# Altium PCB (2023-EE-012)Exp-6.PcbDoc
Units mm, origin at the board's own origin, x right, y up, seen from the top; angles counter-clockwise.
Board outline 166.88 x 122.56 mm, 2 copper layers (Top Layer, Bottom Layer); 85 components, 129 nets, 297 pads, 81 vias.
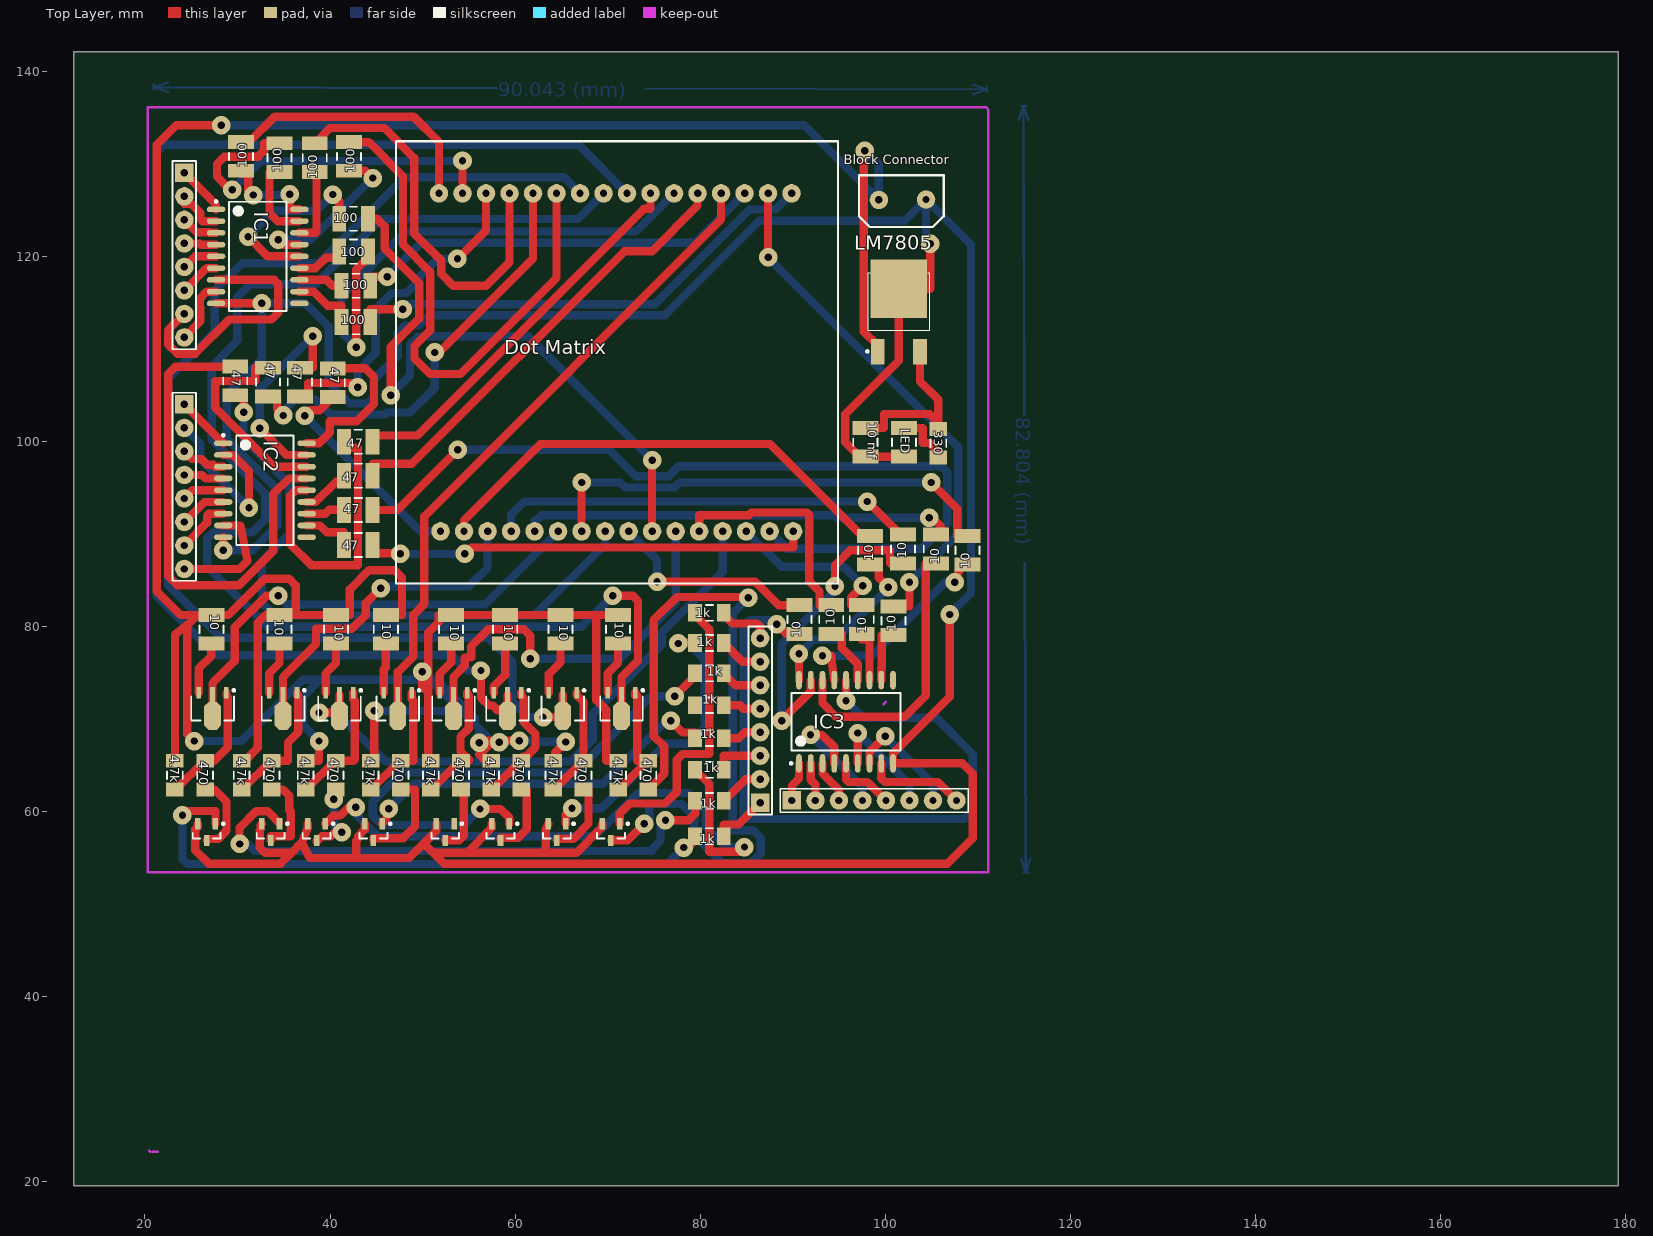
[diagram p0: Top Layer view]
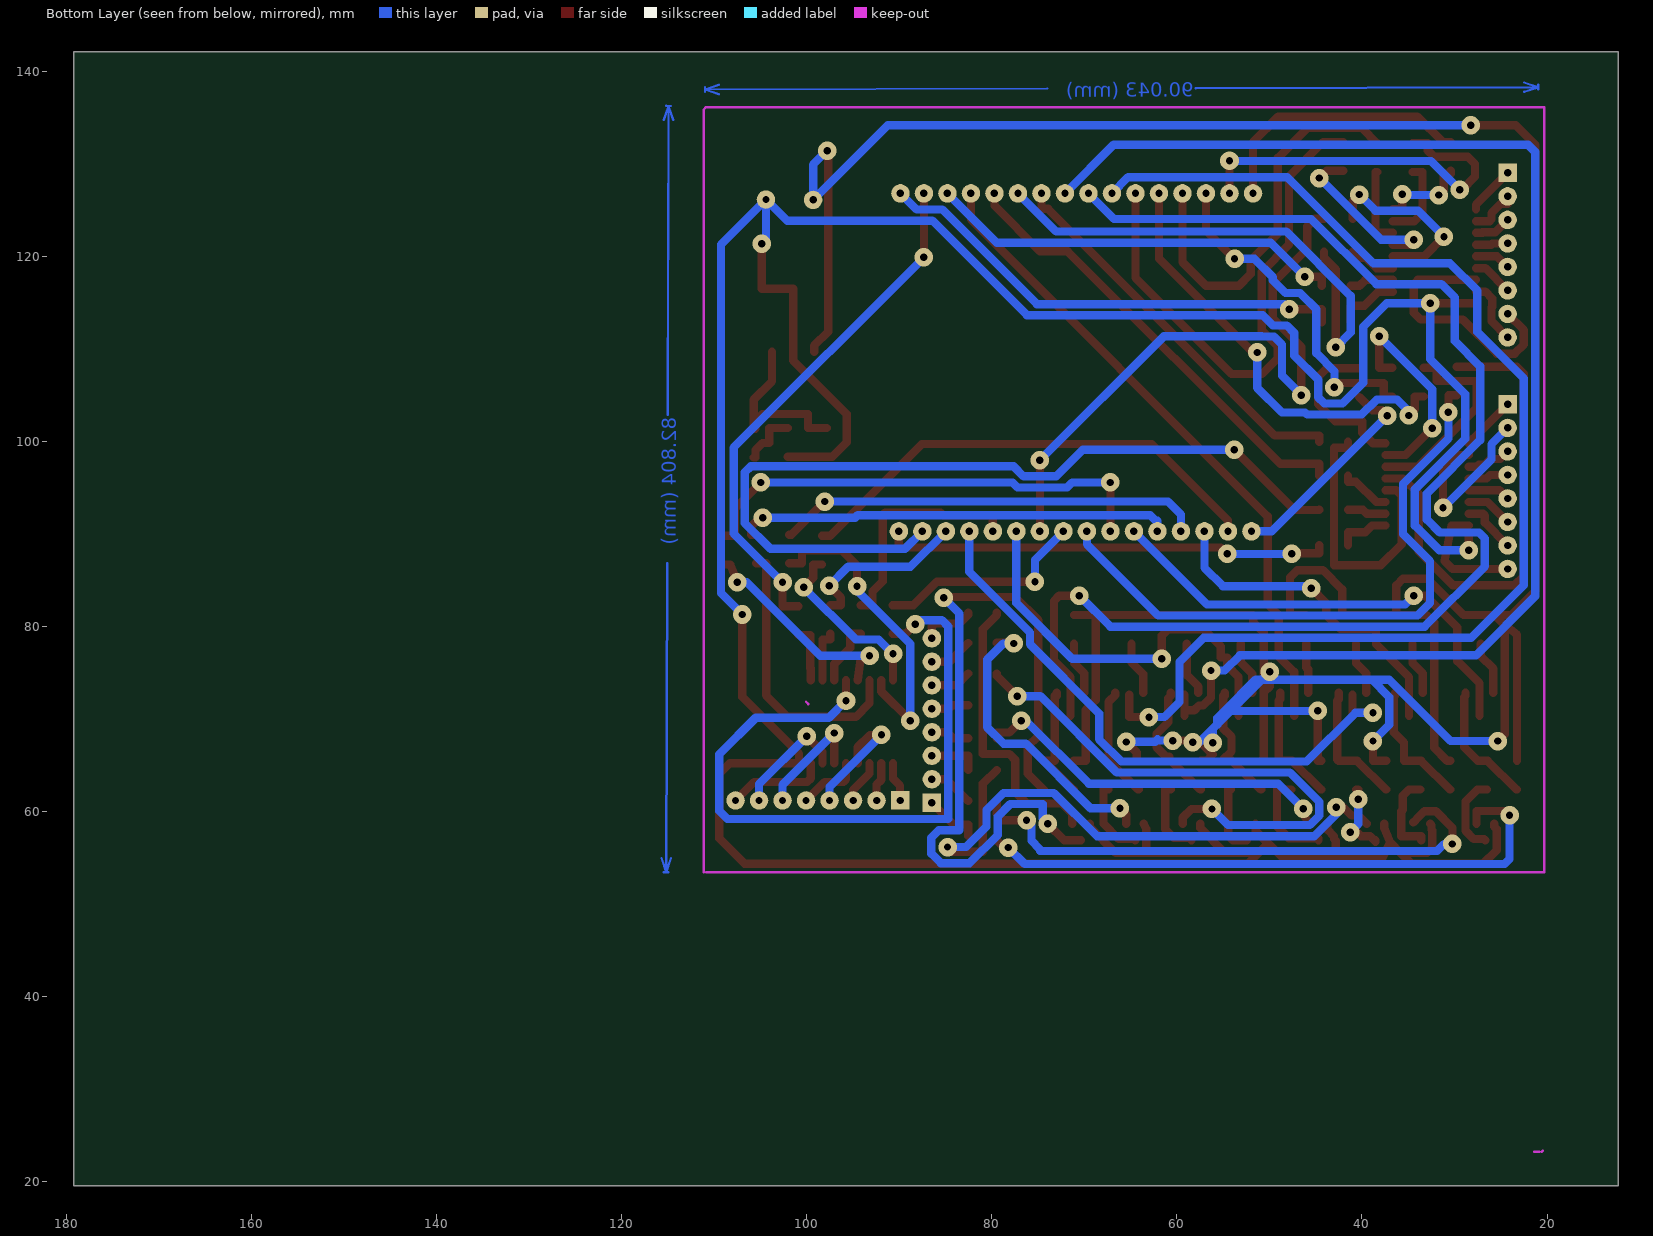
[diagram p1: Bottom Layer view, seen from below]

## Layer stack, top to bottom
Top Solder: solder mask 0.0102, Solder Resist, Dk 3.5
Top Layer: signal copper 0.0356
Dielectric 1: dielectric 0.32, FR-4, Dk 4.8
Bottom Layer: signal copper 0.0356
Bottom Solder: solder mask 0.0102, Solder Resist, Dk 3.5

## Board outline
12.319,19.558 179.197,19.558 179.197,142.113 12.319,142.113

## Design rules (kind name [scope] priority, off if disabled: settings)
Clearance [All] p1: gap=0.3 ignorepadtopadclearanceinfootprint=FALSE
PolygonConnect [All] p1: connectstyle=Relief reliefconductorwidth=0.254 reliefentries=4 polygonreliefangle="90 Angle" airgapwidth=0.254
RoutingVias [All] p1: holewidth=0.8 width=2 viastyle="Through Hole" minholewidth=0.8 minwidth=2 maxholewidth=0.8 maxwidth=2
SolderMaskExpansion [All] p1: expansion=0.102 istentingtop=FALSE
Width [All] p1: maxlimit=1 minlimit=0.7 preferedwidth=0.9 minimp=50.000000 maximp=50.000000 favimp=50.000000
30 further rules are at their usual default settings.

## Components (designator, comment, footprint, x,y, rotation, side; value= is the part's Value field where it differs from the comment)
1k "Comment" RESC3216M 81,61.182 r0 top
1k "Comment" RESC3216M 81,57.372 r0 top
1k "Comment" RESC3216M 81,81.492 r0 top
1k "Comment" RESC3216M 81,64.516 r0 top
1k "Comment" RESC3216M 81,67.951 r0 top
1k "Comment" RESC3216M 81,71.507 r0 top
1k "Comment" RESC3216M 81,74.946 r0 top
1k "Comment" RESC3216M 81,78.238 r0 top
4.7k "Comment" RESC3216M 71.147,63.956 r270 top
4.7k "Comment" RESC3216M 64.135,63.956 r270 top
4.7k "Comment" RESC3216M 57.404,63.956 r270 top
4.7k "Comment" RESC3216M 50.896,63.956 r270 top
4.7k "Comment" RESC3216M 44.379,63.956 r270 top
4.7k "Comment" RESC3216M 37.362,63.956 r270 top
4.7k "Comment" RESC3216M 30.449,63.956 r270 top
4.7k "Comment" RESC3216M 23.241,63.956 r270 top
10 "Comment" RESC3225M 71.12,79.717 r90 top
10 "Comment" RESC3225M 64.897,79.717 r90 top
10 "Comment" RESC3225M 58.928,79.717 r90 top
10 "Comment" RESC3225M 53.086,79.717 r90 top
10 "Comment" RESC3225M 46.03,79.717 r90 top
10 "Comment" RESC3225M 40.64,79.717 r90 top
10 "Comment" RESC3225M 34.544,79.717 r90 top
10 "Comment" RESC3225M 27.178,79.717 r270 top
10 "Comment" RESC3225M 100.892,80.645 r90 top
10 "Comment" RESC3225M 98.352,88.265 r90 top
10 "Comment" RESC3225M 101.908,88.392 r90 top
10 "Comment" RESC3225M 105.464,88.392 r90 top
10 "Comment" RESC3225M 108.893,88.265 r90 top
10 "Comment" RESC3225M 90.732,80.772 r90 top
10 "Comment" RESC3225M 94.161,80.772 r90 top
10 "Comment" RESC3225M 97.463,80.772 r90 top
"10 mf" "Comment" CAPC3225M 97.846,99.92 r270 top
47 "Comment" RESC3225M 40.296,106.358 r270 top
47 "Comment" RESC3225M 36.74,106.426 r270 top
47 "Comment" RESC3225M 43.053,88.81 r0 top
47 "Comment" RESC3225M 43.053,96.303 r0 top
47 "Comment" RESC3225M 33.311,106.426 r270 top
47 "Comment" RESC3225M 43.053,92.62 r0 top
47 "Comment" RESC3225M 29.755,106.553 r270 top
47 "Comment" RESC3225M 43.053,99.986 r0 top
100 "Comment" RESC3225M 38.354,130.683 r90 top
100 "Comment" RESC3225M 42.799,112.903 r0 top
100 "Comment" RESC3225M 42.799,116.84 r0 top
100 "Comment" RESC3225M 42.545,120.523 r0 top
100 "Comment" RESC3225M 42.545,124.079 r0 top
100 "Comment" RESC3225M 30.39,130.81 r90 top
100 "Comment" RESC3225M 34.544,130.683 r90 top
100 "Comment" RESC3225M 42.037,130.81 r90 top
330 "Comment" RESC3216M 105.741,99.822 r270 top
470 "Comment" RESC3216M 74.401,63.956 r270 top
470 "Comment" RESC3216M 67.389,63.955 r270 top
470 "Comment" RESC3216M 60.658,63.955 r270 top
470 "Comment" RESC3216M 54.15,63.956 r270 top
470 "Comment" RESC3216M 47.633,63.955 r270 top
470 "Comment" RESC3216M 40.617,63.955 r270 top
470 "Comment" RESC3216M 33.703,63.955 r270 top
470 "Comment" RESC3216M 26.495,63.955 r270 top
"Dot Matrix" "Comment" "RGB 4.7X4.7" 70.909,108.559 r0 top
IC1 "Comment" SOIC127P1030-18L 32.186,120.015 r0 top
IC2 "Comment" SOIC127P1030-18L 32.965,94.742 r0 top
IC3 "Comment" SOIC127P1030-18L 95.758,69.723 r90 top
LED "Comment" RESC3225M 102.037,99.92 r270 top
LM7805 "Comment" *DPAK228P998X235-3N 101.473,114.046 r0 top
? "Comment" SOT89L 27.305,71.158 r270 top
? "Comment" SOT89L 34.925,71.158 r270 top
? "Comment" SOT89L 41.021,71.158 r270 top
? "Comment" SOT89L 47.324,71.158 r270 top
? "Comment" SOT89L 71.501,71.158 r270 top
? "Comment" SOT89L 65.151,71.158 r270 top
? "Comment" SOT89L 59.182,71.158 r270 top
? "Comment" SOT89L 53.34,71.158 r270 top
? "Comment" SOT23-3L#1 58.42,57.804 r270 top
? "Comment" SOT23-3L#1 44.694,57.804 r270 top
? "Comment" SOT23-3L#2 52.451,57.804 r270 top
? "Comment" SOT23-3L#1 38.547,57.804 r270 top
? "Comment" SOT23-3L#1 26.67,57.804 r270 top
? "Comment" SOT23-3L#1 33.589,57.804 r270 top
? "Comment" SOT23-3L#1 70.358,57.804 r270 top
? "Comment" SOT23-3L#1 64.516,57.804 r270 top
? "Comment" "PCB Block Connector" 101.861,126.134 r0 top
? "Comment" HDR1X8 24.257,129.032 r270 top
? "Comment" HDR1X8 24.257,104.013 r270 top
? "Comment" HDR1X8 89.916,61.214 r0 top
? "Comment" HDR1X8 86.476,60.966 r90 top

## Footprints (in the part's own frame and the unit in brackets; to place one, negate y for a bottom-side part, rotate by r counter-clockwise, add the part's x,y. Pads: shape width x height; smd on the part's side, far side on the other; paste and mask are expansions set on the pad)
*DPAK228P998X235-3N [mm]
  rect 1.5x2.8 smd: 1(-2.28,-4.34) 3(2.28,-4.34)
  rect 6.1x6.3 smd: 2(0,2.48)
  silkscreen extent -3.52,-4.42 3.33,4.2
CAPC3225M [mm] "Chip Capacitor, Body 3.2x2.5mm, IPC Low Density"
  rect 1.5x2.8 smd: 1(-1.55,0) 2(1.55,0)
  silkscreen extent -0.4,-1.3 0.4,1.3, body extent -1.7,-1.35 1.7,1.35, height 1.35
HDR1X8 [mm] "Connector; Header; 8 Position"
  rect 2x2 hole 0.8: 1(0,0)
  round 2 hole 0.8: 2(2.54,0) 3(5.08,0) 4(7.62,0) 5(10.16,0) 6(12.7,0) 7(15.24,0) 8(17.78,0)
  silkscreen extent -1.27,-1.27 19.05,1.27
"PCB Block Connector" [mm]
  round 2 hole 0.8: 1(-2.547,-0.023) 2(2.547,0.023)
  silkscreen extent -4.7,-2.94 4.45,2.65
RESC3216M [mm] "Chip Resistor, Body 3.2x1.6mm, IPC Low Density"
  rect 1.5x1.9 smd: 1(-1.55,0) 2(1.55,0)
  silkscreen extent -0.4,-0.85 0.4,0.85, body extent -1.68,-0.87 1.68,0.87, height 0.71
RESC3225M [mm] "Chip Resistor, Body 3.2x2.5mm, IPC Low Density"
  rect 1.5x2.8 smd: 1(-1.55,0) 2(1.55,0)
  silkscreen extent -0.4,-1.3 0.4,1.3, body extent -1.68,-1.32 1.68,1.32, height 0.71
"RGB 4.7X4.7" [mm]
  round 2 hole 0.8: 1(-18.966,-18.262) 2(-16.426,-18.262) 3(-13.886,-18.262) 4(-11.346,-18.262) 5(-8.806,-18.262) 6(-6.266,-18.262) 7(-3.726,-18.262) 8(-1.186,-18.262) 9(1.354,-18.262) 10(3.894,-18.262) 11(6.434,-18.262) 12(8.974,-18.262) 13(11.514,-18.262) 14(14.054,-18.262) 15(16.594,-18.262) 16(19.134,-18.262) 17(18.966,18.262) 18(16.426,18.262) 19(13.886,18.262) 20(11.346,18.262) 21(8.806,18.262) 22(6.266,18.262) 23(3.726,18.262) 24(1.186,18.262) 25(-1.354,18.262) 26(-3.894,18.262) 27(-6.434,18.262) 28(-8.974,18.262) 29(-11.514,18.262) 30(-14.054,18.262) 31(-16.594,18.262) 32(-19.134,18.262)
  silkscreen extent -23.78,-23.9 23.99,23.89
SOIC127P1030-18L [mm] "SOIC, 18-Leads, Body 11.6x7.5mm, Pitch 1.27mm, IPC High Density"
  oval 2x0.6 smd: 1(-4.5,5.08) 2(-4.5,3.81) 3(-4.5,2.54) 4(-4.5,1.27) 5(-4.5,0) 6(-4.5,-1.27) 7(-4.5,-2.54) 8(-4.5,-3.81) 9(-4.5,-5.08) 10(4.5,-5.08) 11(4.5,-3.81) 12(4.5,-2.54) 13(4.5,-1.27) 14(4.5,0) 15(4.5,1.27) 16(4.5,2.54) 17(4.5,3.81) 18(4.5,5.08)
  silkscreen extent -4.62,-5.9 3.1,6.05, body extent -3.8,-5.95 3.8,5.95, height 2.65
SOT23-3L#1 [mm] "SOT23, 3-Leads, Body 2.9x1.3mm, Pitch 0.95mm, Lead Span 2.5mm, IPC High Density"
  rect 1.2x0.6 smd: 1(-0.9,0.95) 2(-0.9,-0.95) 3(0.9,0)
  silkscreen extent -1.02,-1.5 0.7,1.93, body extent -0.7,-1.5 0.7,1.5, height 1.1
SOT23-3L#2 [mm] "SOT23, 3-Leads, Body 2.9x1.3mm, Pitch 0.95mm, Lead Span 2.5mm, IPC High Density"
  rect 1.2x0.6 smd: 2(-0.9,-0.95) 3(0.9,0) 15(-0.9,0.95)
  silkscreen extent -1.02,-1.5 0.7,1.93, body extent -0.7,-1.5 0.7,1.5, height 1.1
SOT89L [mm] "SOT89, 3-Leads, Body 4.5x2.4 mm, Pitch 1.5mm, Lead Span 4.1mm, IPC High Density"
  rect 1.2x0.5 smd: 1(-1.7,1.5) 3(-1.7,-1.5)
  rect 1.6x0.5 smd: 2(-1.5,0)
  oct 3x1.8 smd: 2(0.8,0)
  silkscreen extent -2.07,-2.3 1.3,2.43, body extent -1.3,-2.3 1.3,2.3, height 1.6

## Part data
100: "100"

## Via types
v1: diameter 2, hole 0.8, Top Layer to Bottom Layer, 81 vias

## Nets (pads, with @x,y where several pads share a name; then routed paths per layer and width w, separated by ;. In a path a pad name is that pad's centre, name@x,y a point inside that pad or via, vN(x,y) a via of type N, cw(c..) or ccw(c..) an arc to the next point about the centre after c; other vN are vias at no path point)
1: 
3: "Dot Matrix.3" ?.2@34.925,70.358 ?.2@34.925,72.658 | length 36.8
  Top Layer w0.9: ?.2@34.925,70.358 34.925,72.658 34.925,74.549 38.481,78.105 38.481,79.756 42.342,79.756 43.866,81.28 43.866,82.55 v1(45.466,84.15)
  Bottom Layer w0.9: v1(45.466,84.15) 45.695,84.379 55.042,84.379 57.023,86.36 57.023,90.297
4.71: 4.7k.2@23.241,62.406 470.1@26.495,65.506 ?.1@28.805,72.858 | length 13.6
  Top Layer w0.9: 4.7k.2@23.241,62.406 23.317,62.406 26.417,65.506 26.495,65.506 27.482,65.506 28.956,66.98 28.956,72.366 28.805,72.517 ?.1@28.805,72.858
4.72: 
4.73: 4.7k.2@37.362,62.406 470.1@40.617,65.506 ?.1@42.521,72.858 | length 13.9
  Top Layer w0.9: 4.7k.2@37.362,62.406 37.414,62.406 40.514,65.506 40.617,65.506 42.541,65.506 42.672,65.636 42.672,72.009 42.521,72.16 ?.1@42.521,72.858
4.74: 4.7k.2@44.379,62.406 470.1@47.633,65.506 ?.1@48.824,72.858 | length 13.3
  Top Layer w0.9: 4.7k.2@44.379,62.406 44.45,62.406 47.55,65.506 47.633,65.506 48.997,65.506 48.997,72.003 48.824,72.176 ?.1@48.824,72.858
4.75: 4.7k.2@50.896,62.406 470.1@54.15,65.506 ?.1@54.84,72.858 | length 13.6
  Top Layer w0.9: 4.7k.2@50.896,62.406 50.952,62.406 54.052,65.506 54.15,65.506 54.991,65.506 54.991,65.637 54.101,66.528 54.101,68.108 54.991,68.998 54.991,72.517 54.84,72.517 ?.1@54.84,72.858
4.76: 4.7k.2@57.404,62.406 470.1@60.658,65.506 ?.1@60.682,72.858 | length 13.4
  Top Layer w0.9: 4.7k.2@57.404,62.406 57.48,62.406 60.658,65.506 60.833,65.506 60.833,65.941 61.177,65.941 62.202,66.966 62.202,68.416 60.926,69.692 60.926,72.273 60.682,72.517 ?.1@60.682,72.858
4.77: 4.7k.2@64.135,62.406 470.1@67.389,65.506 ?.1@66.651,72.858 | length 12.2
  Top Layer w0.9: 4.7k.2@64.135,62.406 64.211,62.406 470.1@67.386,65.506 ; ?.1@66.651,72.858 66.651,72.619 67.386,71.883 470.1@67.386,65.506 ; 470.1@67.389,65.506 470.1@67.386,65.506
4.78: 4.7k.2@71.147,62.406 470.1@74.401,65.506 ?.1@73.001,72.858 | length 13.2
  Top Layer w0.9: 4.7k.2@71.147,62.406 71.222,62.406 470.1@74.322,65.506 ; ?.1@73.001,72.858 73.001,72.517 73.199,72.517 73.199,65.506 470.1@74.322,65.506 ; 470.1@74.401,65.506 470.1@74.322,65.506
5: 
6: "Dot Matrix.6" ?.2@27.305,70.358 ?.2@27.305,72.658 | length 50.6
  Top Layer w0.9: ?.2@27.305,70.358 27.305,72.658 27.305,73.889 29.693,76.276 29.693,79.908 33.122,83.337 v1(34.392,83.337)
  Bottom Layer w0.9: v1(34.392,83.337) 35.329,82.4 56.746,82.4 64.643,90.297
10: 
11: 1k.1@79.45,57.373 ?.1@27.62,58.704 | length 67.5
  Top Layer w0.9: v1(24.054,59.614) 24.511,60.071 27.62,60.071 ?.1@27.62,58.704 ; v1(78.232,56.134) 78.232,55.853 78.332,55.753 79.45,56.871 1k.1@79.45,57.373
  Bottom Layer w0.9: v1(24.054,59.614) 24.054,54.871 24.581,54.344 76.442,54.344 v1(78.232,56.134)
12: 1k.1@79.45,61.183 ?.1@34.539,58.704 | length 60.6
  Top Layer w0.9: v1(30.226,56.515) 30.226,58.252 32.028,60.054 33.25,60.054 33.813,59.491 ?.1@34.45,58.854 ; v1(76.251,59.08) 78.74,59.08 79.45,59.79 1k.1@79.45,61.183
  Bottom Layer w0.9: v1(30.226,56.515) 31.115,56.515 31.877,55.753 74.803,55.753 ; 74.844,55.997 75.717,56.871 75.717,58.547 v1(76.251,59.08)
13: 1k.1@79.45,64.516 ?.1@39.497,58.704 | length 66.7
  Top Layer w0.9: ?.1@39.497,58.704 39.497,58.725 40.363,59.591 41.111,59.591 41.992,60.472 v1(42.773,60.472) ; 1k.1@79.45,64.516 80.975,63.043 80.975,55.672 84.273,55.672 v1(84.785,56.185)
  Bottom Layer w0.9: v1(42.773,60.472) 42.773,59.735 45.153,57.355 68.632,57.355 73.308,62.03 78.74,62.03 80.572,60.198 80.572,58.388 82.776,56.185 v1(84.785,56.185)
14: 1k.1@79.45,67.951 ?.1@45.644,58.704 | length 40
  Top Layer w0.9: ?.1@45.644,58.704 46.406,59.766 46.355,59.817 v1(46.355,60.325) ; v1(76.835,69.825) 78.105,68.555 79.45,68.555 1k.1@79.45,67.951
  Bottom Layer w0.9: v1(46.355,60.325) 49.063,63.033 69.511,63.033 76.302,69.825 v1(76.835,69.825)
15: 1k.1@79.45,71.507
16: 1k.1@79.45,74.946 ?.1@59.37,58.704 | length 59.2
  Top Layer w0.9: v1(56.21,60.3) 58.42,60.3 59.37,59.35 ?.1@59.37,58.704 ; v1(77.267,72.492) 79.45,74.675 1k.1@79.45,74.946
  Bottom Layer w0.9: v1(56.21,60.3) 54.486,58.575 45.63,58.575 44.605,59.6 44.605,61.05 47.788,64.233 66.499,64.233 74.757,72.492 v1(77.267,72.492)
17: 1k.1@79.45,78.238 ?.1@65.466,58.704 | length 32.7
  Top Layer w0.9: ?.1@65.466,58.704 65.466,59.69 v1(66.152,60.376) ; v1(77.622,78.181) 77.699,78.257 79.45,78.257 1k.1@79.45,78.238
  Bottom Layer w0.9: v1(66.152,60.376) 69.342,60.376 76.327,67.361 78.74,67.361 80.493,69.113 80.493,76.454 78.765,78.181 v1(77.622,78.181)
18: 1k.1@79.45,81.492 ?.1@71.308,58.704 | length 31.3
  Top Layer w0.9: ?.1@71.308,58.704 71.308,59.802 72.39,60.884 76.2,60.884 77.47,62.154 77.47,65.608 78.105,66.243 80.975,66.243 80.975,79.755 79.45,81.28 1k.1@79.45,81.492
101: 100.2@30.39,132.36 "Dot Matrix.32" | length 29.2
  Top Layer w0.9: 100.2@30.39,132.36 31.268,132.36 34.011,135.103 49.047,135.103 51.776,132.374 51.776,126.821
102: 100.2@34.544,132.233 "Dot Matrix.31" | length 41.4
  Top Layer w0.9: v1(29.413,127.203) 29.21,127.203 27.788,128.626 27.788,129.997 28.575,130.785 32.233,130.785 32.893,131.445 32.893,132.233 100.2@34.544,132.233 ; 54.316,126.821 v1(54.316,130.327)
  Bottom Layer w0.9: v1(29.413,127.203) 32.537,130.327 v1(54.316,130.327)
103: 100.2@38.354,132.233 "Dot Matrix.29" | length 42.9
  Top Layer w0.9: 100.2@38.354,132.233 40.004,133.883 45.872,133.883 49.095,130.661 49.095,122.472 52.027,119.54 52.027,118.11 53.297,116.84 56.856,116.84 59.396,119.38 59.396,126.821
104: 100.2@42.037,132.36 "Dot Matrix.27" | length 58.5
  Top Layer w0.9: 100.2@42.037,132.36 44.196,132.36 47.895,128.661 47.895,121.272 50.827,118.34 50.827,112.012 49.127,110.312 49.127,108.981 50.8,107.309 54.098,107.309 64.476,117.687 64.476,126.821
105: 100.2@44.095,124.079 "Dot Matrix.10" | length 69.3
  Top Layer w0.9: 100.2@44.095,124.079 45.085,124.079 45.907,123.257 45.907,120.86 49.627,117.14 49.627,113.282 46.558,110.213 v1(46.558,105.026) ; 74.803,90.297 v1(74.803,97.993)
  Bottom Layer w0.9: v1(46.558,105.026) 48.651,107.119 48.651,110.497 49.504,111.35 50.801,111.35 50.827,111.376 61.42,111.376 v1(74.803,97.993)
106: 100.2@44.095,120.523 "Dot Matrix.22" | length 57.6
  Top Layer w0.9: v1(42.824,110.185) 42.824,118.593 44.095,119.863 100.2@44.095,120.523
  Bottom Layer w0.9: v1(42.824,110.185) 41.224,111.785 41.224,115.742 48.179,122.696 73.051,122.696 77.176,126.821
107: 100.2@44.349,116.84 "Dot Matrix.19" | length 45.1
  Top Layer w0.9: 100.2@44.349,116.84 44.349,117.805 v1(46.177,117.805)
  Bottom Layer w0.9: v1(46.177,117.805) 49.868,121.496 79.471,121.496 84.796,126.821
108: 100.2@44.349,112.903 "Dot Matrix.17" | length 52.1
  Top Layer w0.9: 100.2@44.349,112.903 44.349,114.3 v1(47.854,114.3)
  Bottom Layer w0.9: v1(47.854,114.3) 48.41,114.856 75.128,114.856 85.343,125.071 88.126,125.071 89.876,126.821
471: 47.2@40.296,104.808 "Dot Matrix.1" | length 23.7
  Top Layer w0.9: v1(37.262,102.794) 37.844,103.376 38.864,103.376 47.2@40.296,104.808
  Bottom Layer w0.9: v1(37.262,102.794) 49.759,90.297 51.943,90.297
472: 47.2@36.74,104.876 "Dot Matrix.30" | length 36.8
  Top Layer w0.9: 47.2@36.74,104.876 37.643,104.876 37.643,106.324 42.443,106.324 42.901,105.867 v1(42.977,105.867) ; v1(53.772,119.746) 56.856,122.831 56.856,126.821
  Bottom Layer w0.9: v1(42.977,105.867) 42.977,107.597 44.927,109.547 44.927,114.3 46.683,116.056 48.26,116.056 49.627,117.423 49.627,117.758 51.616,119.746 v1(53.772,119.746)
473: 47.2@33.311,104.876 "Dot Matrix.28" | length 48.2
  Top Layer w0.9: 47.2@33.311,104.876 34.29,104.876 34.29,103.48 v1(34.95,102.819) ; v1(51.32,109.626) 51.79,109.626 61.936,119.772 61.936,126.821
  Bottom Layer w0.9: v1(34.95,102.819) 34.95,103.302 36.195,104.546 38.398,104.546 40.027,102.917 45.927,102.917 46.155,103.146 48.65,103.146 51.32,105.816 v1(51.32,109.626)
474: 47.2@29.755,105.003 "Dot Matrix.8" | length 68.8
  Top Layer w0.9: 47.2@29.755,105.003 30.658,105.003 v1(30.658,103.175)
  Bottom Layer w0.9: v1(30.658,103.175) 30.658,100.33 35.56,95.428 35.56,89.992 32.642,87.074 32.642,82.55 33.991,81.2 62.023,81.2 69.723,88.9 69.723,90.297
475: 47.2@44.603,99.986 "Dot Matrix.23" | length 42.5
  Top Layer w0.9: 47.2@44.603,99.986 44.603,100.66 49.428,100.66 73.914,125.146 74.636,125.146 74.636,126.821
476: 47.2@44.603,96.303 "Dot Matrix.21" | length 49.3
  Top Layer w0.9: 47.2@44.603,96.303 44.603,97.587 48.828,97.587 71.801,120.56 74.789,120.56 79.716,125.487 79.716,126.821
477: 47.2@44.603,92.62 "Dot Matrix.15" | length 93.3
  Top Layer w0.9: 47.2@44.603,92.62 44.603,92.608 47.295,92.608 v1(53.797,99.111)
  Bottom Layer w0.9: v1(53.797,99.111) 70.183,99.111 73.05,96.243 76.556,96.243 77.645,97.333 106.045,97.333 106.703,96.675 106.703,91.209 103.911,88.417 89.383,88.417 87.503,90.297
478: 47.2@44.603,88.81 "Dot Matrix.16" | length 48.4
  Top Layer w0.9: 47.2@44.603,88.81 44.603,87.935 46.786,87.935 46.862,87.859 v1(47.6,87.859) ; v1(54.559,87.859) 55.245,88.544 90.043,88.544 90.043,90.297
  Bottom Layer w0.9: v1(47.6,87.859) v1(54.559,87.859)
1001: 10.2@98.352,89.815 "Dot Matrix.2" | length 52.6
  Top Layer w0.9: 54.483,90.297 54.483,91.491 62.735,99.743 87.557,99.743 97.485,89.815 10.2@98.352,89.815
1002: 10.2@101.908,89.942 "Dot Matrix.4" | length 46.2
  Top Layer w0.9: v1(98.07,93.523) 101.651,89.942 10.2@101.908,89.942
  Bottom Layer w0.9: 59.563,90.297 59.563,92.126 60.96,93.523 v1(98.07,93.523)
1003: 10.2@105.464,89.942 "Dot Matrix.5" | length 47.2
  Top Layer w0.9: v1(104.75,91.77) 105.054,91.77 106.02,90.805 106.02,89.942 10.2@105.464,89.942
  Bottom Layer w0.9: 62.103,90.297 62.103,91.44 62.283,91.44 62.893,92.05 94.488,92.05 94.767,91.77 v1(104.75,91.77)
1004: 10.2@108.893,89.815 "Dot Matrix.7" | length 51.5
  Top Layer w0.9: 67.183,90.297 v1(67.183,95.58) ; v1(104.953,95.58) 107.798,92.735 107.798,89.815 10.2@108.893,89.815
  Bottom Layer w0.9: v1(67.183,95.58) 71.316,95.58 71.853,95.043 77.216,95.043 77.753,95.58 v1(104.953,95.58)
1005: 10.2@90.732,82.322 "Dot Matrix.9" | length 23.2
  Top Layer w0.9: v1(75.336,84.861) 85.929,84.861 88.468,82.322 10.2@90.732,82.322
  Bottom Layer w0.9: 72.263,90.297 75.336,87.224 v1(75.336,84.861)
1006: 10.2@94.161,82.322 "Dot Matrix.12" | length 25.3
  Top Layer w0.9: 79.883,90.297 79.883,92.05 85.268,92.05 85.547,92.329 91.516,92.329 91.796,92.05 91.796,84.887 92.888,83.795 92.888,82.322 10.2@94.161,82.322
1007: 10.2@97.463,82.322 "Dot Matrix.14" | length 18.8
  Top Layer w0.9: 10.2@97.463,82.322 96.317,82.322 96.317,83.134 v1(97.587,84.404)
  Bottom Layer w0.9: 84.963,90.297 88.783,86.477 95.514,86.477 v1(97.587,84.404)
1008: 10.2@100.892,82.195 "Dot Matrix.18" | length 57.1
  Top Layer w0.9: v1(87.336,119.903) 87.336,126.821 ; 10.2@100.892,82.195 102.616,82.195 v1(102.616,84.785)
  Bottom Layer w0.9: v1(87.336,119.903) 107.903,99.336 107.903,90.072 v1(102.616,84.785)
4701: 470.2@26.495,62.406 ?.3@26.67,56.904 | length 8.6
  Top Layer w0.9: 470.2@26.495,62.406 27.529,62.406 28.82,61.115 28.82,57.944 27.931,57.054 26.82,57.054 ?.3@26.67,56.904
4702: 470.2@33.703,62.406 ?.3@33.589,56.904 | length 9.2
  Top Layer w0.9: ?.3@33.589,56.904 33.589,57.353 35.739,57.353 35.739,60.054 35.589,60.204 35.589,61.741 34.925,62.406 470.2@33.703,62.406
4703: 470.2@40.617,62.406 ?.3@38.547,56.904 | length 9.5
  Top Layer w0.9: ?.3@38.547,56.904 38.547,56.769 39.132,57.354 40.108,57.354 40.538,57.785 v1(41.275,57.785) ; v1(40.386,61.341) 40.386,60.833 40.386,62.406 470.2@40.617,62.406
  Bottom Layer w0.9: v1(40.386,61.341) 40.386,58.674 v1(41.275,57.785)
4704: 470.2@47.633,62.406 ?.3@44.694,56.904 | length 10.8
  Top Layer w0.9: ?.3@44.694,56.904 44.694,57.15 47.904,57.15 49.174,58.42 49.174,62.406 470.2@47.633,62.406
4705: 470.2@54.15,62.406 ?.3@52.451,56.904 | length 7.5
  Top Layer w0.9: ?.3@52.451,56.904 53.939,56.904 54.451,57.417 54.451,62.406 470.2@54.15,62.406
4706: 470.2@60.658,62.406 ?.3@58.42,56.904 | length 8.4
  Top Layer w0.9: ?.3@58.42,56.904 58.42,57.175 60.325,57.175 61.265,58.115 61.265,62.406 470.2@60.658,62.406
4707: 470.2@67.389,62.406 ?.3@64.516,56.904 | length 8.5
  Top Layer w0.9: ?.3@64.516,56.904 64.516,57.074 66.294,57.074 67.935,58.715 67.935,62.406 470.2@67.389,62.406
4708: 470.2@74.401,62.406 ?.3@70.358,56.904 | length 84.7
  Top Layer w0.9: ?.3@70.358,56.904 72.17,56.904 v1(73.965,58.699) ; 470.2@74.401,62.406 76.124,64.129 76.124,67.031 74.981,68.174 74.981,80.696 77.495,83.21 85.09,83.21 v1(85.192,83.109)
  Bottom Layer w0.9: v1(73.965,58.699) 74.508,59.243 74.508,60.83 78.008,60.83 79.35,59.489 79.35,57.491 82.406,54.435 85.51,54.435 86.538,55.463 86.538,57.195 85.725,58.007 83.508,58.007 83.508,81.425 v1(85.192,83.109)
47002: 4.7k.2@30.449,62.406 470.1@33.703,65.506 ?.1@36.425,72.858 | length 14.3
  Top Layer w0.9: 4.7k.2@30.449,62.406 30.505,62.406 33.605,65.506 33.703,65.506 35.458,65.506 35.458,67.488 36.576,68.605 36.576,72.517 36.425,72.517 ?.1@36.425,72.858
/11: "Dot Matrix.11" ?.2@53.34,70.358 ?.2@53.34,72.658 | length 44.6
  Top Layer w0.9: ?.2@53.34,70.358 53.34,72.658 53.34,74.574 54.559,75.794 54.559,76.657 55.245,76.657 55.245,77.851 57.099,79.705 60.96,79.705 61.62,79.045 v1(61.62,76.53)
  Bottom Layer w0.9: v1(61.62,76.53) 71.323,76.53 77.343,82.55 77.343,90.297
/13: "Dot Matrix.13" ?.2@41.021,70.358 ?.2@41.021,72.658 | length 65.5
  Top Layer w0.9: v1(38.811,70.688) ?.2@41.021,70.688 ; ?.2@41.021,70.358 ?.2@41.021,70.688 ; ?.2@41.021,72.658 ?.2@41.021,70.688
  Bottom Layer w0.9: v1(38.811,70.688) 40.716,70.688 45.971,65.433 66.002,65.433 68.394,67.826 68.394,70.62 75.872,78.098 75.872,79.375 82.423,85.926 82.423,90.297
/20: "Dot Matrix.20" ?.2@47.324,70.358 ?.2@47.324,72.658 | length 70.9
  Top Layer w0.9: ?.2@47.324,70.358 47.324,72.658 47.324,75.111 48.997,76.784 48.997,81.28 50.19,82.474 50.19,91.927 82.256,123.993 82.256,126.821
/24: "Dot Matrix.24" ?.2@59.182,70.358 ?.2@59.182,72.658 | length 148.4
  Top Layer w0.9: v1(56.312,75.26) 56.312,72.318 57.156,71.473 57.621,71.473 58.126,70.968 ?.2@59.182,70.968 ; ?.2@59.182,70.358 ?.2@59.182,70.968 ; ?.2@59.182,72.658 ?.2@59.182,70.968
  Bottom Layer w0.9: v1(56.312,75.26) 54.839,75.26 53.2,76.899 27.673,76.899 21.285,83.287 21.285,131.318 22.045,132.077 66.84,132.077 72.096,126.821
/25: "Dot Matrix.25" ?.2@71.501,70.358 ?.2@71.501,72.658 | length 145.9
  Top Layer w0.9: v1(70.536,83.337) 72.72,83.337 73.279,82.779 73.279,76.327 71.501,74.549 71.501,72.658 ?.2@71.501,70.358
  Bottom Layer w0.9: 69.556,126.821 66.795,124.06 45.498,124.06 38.455,117.018 31.42,117.018 29.972,115.57 29.972,110.871 27.229,108.128 27.229,100.152 32.995,94.386 32.995,91.567 31.598,90.17 27.356,90.17 26.721,89.535 26.721,86.512 33.233,80 67.199,80 v1(70.536,83.337)
/26: "Dot Matrix.26" ?.2@65.151,70.358 ?.2@65.151,72.658 | length 132.7
  Top Layer w0.9: v1(63.017,70.231) 65.151,70.231 65.151,70.358 ?.2@65.151,72.658
  Bottom Layer w0.9: v1(63.017,70.231) 61.341,70.231 59.715,71.857 59.715,76.2 57.125,78.791 28.194,78.791 22.504,84.48 22.504,106.807 27.534,111.836 27.534,116.307 30.48,119.253 38.76,119.253 48.082,128.575 65.262,128.575 67.016,126.821
/101: 10.2@27.178,78.167 ?.3@25.805,72.858 | length 5.9
  Top Layer w0.9: ?.3@25.805,72.858 25.805,75.462 27.178,76.835 10.2@27.178,78.167
/102: 10.1@34.544,78.167 ?.3@33.425,72.858 | length 5.8
  Top Layer w0.9: ?.3@33.425,72.858 33.425,74.93 34.544,76.049 10.1@34.544,78.167
/103: 10.1@40.64,78.167 ?.3@39.521,72.858 | length 5.8
  Top Layer w0.9: ?.3@39.521,72.858 39.521,74.93 40.64,76.049 10.1@40.64,78.167
/104: 10.1@46.03,78.167 ?.3@45.824,72.858 | length 5.4
  Top Layer w0.9: ?.3@45.824,72.858 45.824,75.387 46.03,75.593 10.1@46.03,78.167
/105: 10.1@53.086,78.167 ?.3@51.84,72.858 | length 5.8
  Top Layer w0.9: ?.3@51.84,72.858 51.84,74.879 53.086,76.125 10.1@53.086,78.167
/106: 10.1@58.928,78.167 ?.3@57.682,72.858 | length 5.8
  Top Layer w0.9: ?.3@57.682,72.858 57.682,73.51 58.928,74.756 10.1@58.928,78.167
/107: 10.1@64.897,78.167 ?.3@63.651,72.858 | length 5.8
  Top Layer w0.9: ?.3@63.651,72.858 63.651,74.879 64.897,76.125 10.1@64.897,78.167
/108: 10.1@71.12,78.167 ?.3@70.001,72.858 | length 5.8
  Top Layer w0.9: ?.3@70.001,72.858 70.001,74.93 71.12,76.049 10.1@71.12,78.167
b1: ?.1@89.916,61.214 IC3.1 | length 4.3
  Top Layer w0.9: ?.1@89.916,61.214 89.916,62.814 90.678,63.576 IC3.1
b2: ?.2@92.456,61.214 IC3.2 | length 4.2
  Top Layer w0.9: IC3.2 91.948,63.449 92.456,62.941 ?.2@92.456,61.214
b3: ?.3@94.996,61.214 IC3.3 | length 4.7
  Top Layer w0.9: IC3.3 93.218,64.135 94.996,62.357 ?.3@94.996,61.214
b4: ?.4@97.536,61.214 IC3.4 | length 14.3
  Top Layer w0.9: v1(91.923,68.301) 93.167,68.301 94.488,66.98 IC3.4
  Bottom Layer w0.9: v1(91.923,68.301) 97.536,62.687 ?.4@97.536,61.214
b5: ?.5@100.076,61.214 IC3.5 | length 7
  Top Layer w0.9: IC3.5 95.758,63.5 96.037,63.221 98.069,63.221 ?.5@100.076,61.214
b6: ?.6@102.616,61.214 IC3.6 | length 12.9
  Top Layer w0.9: IC3.6 v1(97.028,68.504)
  Bottom Layer w0.9: v1(97.028,68.504) 102.616,62.916 ?.6@102.616,61.214
b7: ?.7@105.156,61.214 IC3.7 | length 12.7
  Top Layer w0.9: IC3.7 98.298,66.446 v1(100,68.148)
  Bottom Layer w0.9: v1(100,68.148) 105.156,62.992 ?.7@105.156,61.214
b8: ?.8@107.696,61.214 IC3.8 | length 10.7
  Top Layer w0.9: IC3.8 99.568,63.602 99.949,63.221 105.689,63.221 ?.8@107.696,61.214
g1: ?.1@24.257,104.013 IC2.1 | length 5.9
  Top Layer w0.9: ?.1@24.257,104.013 27.305,100.965 IC2.1
g2: ?.2@24.257,101.473 IC2.2 | length 19
  Top Layer w0.9: IC2.2 29.516,98.552 31.242,96.826 v1(31.242,92.837)
  Bottom Layer w0.9: ?.2@24.257,101.473 26.01,99.72 26.01,98.069 v1(31.242,92.837)
g3: ?.3@24.257,98.933 IC2.3 | length 4.9
  Top Layer w0.9: ?.3@24.257,98.933 25.07,98.12 26.111,98.12 26.721,97.511 27.356,97.511 27.584,97.282 IC2.3
g4: ?.4@24.257,96.393 IC2.4 | length 4.4
  Top Layer w0.9: ?.4@24.257,96.393 26.162,96.393 26.543,96.012 IC2.4
g5: ?.5@24.257,93.853 IC2.5 | length 4.6
  Top Layer w0.9: ?.5@24.257,93.853 25.146,94.742 IC2.5
g6: ?.6@24.257,91.313 IC2.6 | length 5.1
  Top Layer w0.9: ?.6@24.257,91.313 26.416,93.472 IC2.6
g7: ?.7@24.257,88.773 IC2.7 | length 6.1
  Top Layer w0.9: ?.7@24.257,88.773 26.721,91.237 26.721,91.999 26.924,92.202 IC2.7
g8: ?.8@24.257,86.233 IC2.8 | length 13
  Top Layer w0.9: ?.8@24.257,86.233 30.226,86.233 31.084,87.091 30.322,90.932 IC2.8
GND: "10 mf.2" ?.2@25.72,58.704 ?.2@32.639,58.704 ?.2@37.597,58.704 ?.2@43.744,58.704 ?.2@51.501,58.704 ?.2@57.47,58.704 ?.2@63.566,58.704 ?.2@69.408,58.704 ?.2@104.408,126.156 IC1.9 IC2.9 IC3.9 LED.2 LM7805.2 | length 392.7
  Top Layer w0.9: ?.2@25.72,58.704 25.72,58.395 25.451,58.125 25.451,55.829 26.896,54.384 34.658,54.384 35.824,55.55 ; IC1.9 v1(32.639,114.935) ; IC2.9 28.473,89.662 v1(28.473,88.265) ; ?.2@32.639,58.704 32.489,58.554 32.489,58.078 32.389,57.979 32.389,57.85 32.389,56.144 32.983,55.55 35.824,55.55 ; ?.2@37.597,58.704 37.597,58.242 37.266,57.448 36.939,56.665 ; ?.2@43.744,58.704 43.744,58.056 43.025,57.338 43.025,57.06 42.837,56.873 42.837,54.996 ; ?.2@51.501,58.704 51.501,57.963 50.128,56.59 ; ?.2@57.47,58.704 57.47,58.242 54.779,55.551 ; ?.2@63.566,58.704 63.297,58.125 63.297,55.55 ; ?.2@69.408,58.704 69.408,58.344 66.614,55.55 63.297,55.55 ; IC3.9 IC3.9@100.838,65.227 ; LED.2 100.406,98.37 97.846,98.37 97.236,98.37 95.682,99.924 95.682,102.972 101.473,108.763 LM7805.2 104.877,116.526 v1(104.877,121.361) ; v1(106.959,81.313) 106.959,72.39 100.838,66.269 IC3.9@100.838,65.227 ; 35.824,55.55 36.939,56.665 ; 36.939,56.665 37.823,54.996 42.837,54.996 ; 42.837,54.996 48.534,54.996 50.128,56.59 ; 50.128,56.59 51.168,55.551 ; 51.168,55.551 54.779,55.551 ; 51.168,55.551 52.334,54.384 106.733,54.384 109.449,57.099 109.449,64.11 108.331,65.227 IC3.9@100.838,65.227 ; 51.168,55.551 54.779,55.551 ; 54.779,55.551 63.297,55.55
  Bottom Layer w0.9: v1(28.473,88.265) 31.648,88.265 34.29,90.907 34.29,94.847 28.854,100.283 28.854,105.137 32.639,108.922 v1(32.639,114.935) 37.338,114.935 39.878,112.395 39.878,106.35 42.111,104.117 44.069,104.117 44.727,104.775 44.727,106.683 47.327,109.283 47.327,111.76 48.117,112.55 49.627,112.55 50.733,113.656 76.211,113.656 86.426,123.871 102.122,123.871 ?.2@104.408,126.156 ; v1(104.877,121.361) 104.408,121.83 ?.2@104.408,126.156 ; v1(106.959,81.313) 109.264,83.618 109.264,121.301 ?.2@104.408,126.156
ic11: 100.1@30.39,129.26 IC1.18 | length 10.3
  Top Layer w0.9: 100.1@30.39,129.26 30.39,128.956 31.166,128.956 31.166,127.178 v1(31.699,126.644) ; v1(35.662,126.721) 35.662,125.095 IC1.18
  Bottom Layer w0.9: v1(31.699,126.644) 35.585,126.644 v1(35.662,126.721)
ic12: 100.1@34.544,129.133 IC1.17 | length 9.1
  Top Layer w0.9: 100.1@34.544,129.133 33.463,129.133 33.463,124.698 34.336,123.825 IC1.17
ic13: 100.1@38.354,129.133 IC1.16 | length 8.6
  Top Layer w0.9: IC1.16 38.451,122.555 38.534,122.638 38.534,129.133 100.1@38.354,129.133
ic14: 100.1@42.037,129.26 IC1.15 | length 18.4
  Top Layer w0.9: v1(34.392,121.818) 34.925,121.285 IC1.15 ; 100.1@42.037,129.26 43.823,129.26 v1(44.603,128.48)
  Bottom Layer w0.9: v1(34.392,121.818) 37.942,121.818 v1(44.603,128.48)
ic15: 100.1@40.995,124.079 IC1.14 | length 20.4
  Top Layer w0.9: v1(31.139,122.147) 33.271,120.015 IC1.14 ; v1(40.284,126.695) 40.995,125.985 100.1@40.995,124.079
  Bottom Layer w0.9: v1(31.139,122.147) 33.951,124.96 38.549,124.96 v1(40.284,126.695)
ic16: 100.1@40.995,120.523 IC1.13 | length 5.4
  Top Layer w0.9: IC1.13 38.43,118.745 39.548,119.863 40.995,119.863 100.1@40.995,120.523
ic17: 100.1@41.249,116.84 IC1.12 | length 4.8
  Top Layer w0.9: IC1.12 39.636,117.475 40.271,116.84 100.1@41.249,116.84
ic18: 100.1@41.249,112.903 IC1.11 | length 7
  Top Layer w0.9: IC1.11 38.202,116.205 39.726,114.681 41.249,114.681 100.1@41.249,112.903
ic21: 47.1@40.296,107.908 IC2.18 | length 17.5
  Top Layer w0.9: IC2.18 38.837,99.822 39.98,100.965 39.98,102.184 42.875,102.184 44.746,104.055 44.746,106.977 43.815,107.908 47.1@40.296,107.908
ic22: 47.1@36.74,107.976 IC2.17 | length 23.4
  Top Layer w0.9: v1(32.41,101.422) 35.281,98.552 IC2.17 ; 47.1@36.74,107.976 38.125,107.976 v1(38.125,111.379)
  Bottom Layer w0.9: v1(32.41,101.422) 32.41,105.664 v1(38.125,111.379)
ic23: 47.1@33.311,107.976 IC2.16 | length 22.6
  Top Layer w0.9: 47.1@33.311,107.976 31.928,107.976 31.928,106.553 27.584,106.553 27.584,103.657 33.96,97.282 IC2.16
ic24: 47.1@29.755,108.103 IC2.15 | length 53.2
  Top Layer w0.9: 47.1@29.755,108.103 23.292,108.103 22.504,107.315 22.504,85.471 23.495,84.48 30.189,84.48 33.858,88.149 33.858,94.31 35.56,96.012 IC2.15
ic25: 47.1@41.503,99.986 IC2.14 | length 30.4
  Top Layer w0.9: IC2.14 36.297,94.742 35.712,94.158 35.712,88.9 37.973,86.639 43.028,86.639 43.028,99.339 41.503,99.339 47.1@41.503,99.986
ic26: 47.1@41.503,96.303 IC2.13 | length 5.6
  Top Layer w0.9: IC2.13 38.456,93.472 40.64,95.656 41.503,95.656 47.1@41.503,96.303
ic27: 47.1@41.503,92.62 IC2.12 | length 4.2
  Top Layer w0.9: IC2.12 39.472,92.202 39.889,92.62 47.1@41.503,92.62
ic28: 47.1@41.503,88.81 IC2.11 | length 5.7
  Top Layer w0.9: IC2.11 38.913,90.932 39.649,90.195 41.503,90.195 47.1@41.503,88.81
ic31: 10.1@98.352,86.715 IC3.18 | length 19.3
  Top Layer w0.9: IC3.18 v1(90.678,77.064) ; 10.1@98.352,86.715 99.302,86.715 99.302,85.28 v1(100.33,84.252)
  Bottom Layer w0.9: v1(90.678,77.064) 92.225,78.61 94.689,78.61 v1(100.33,84.252)
ic32: 10.1@101.908,86.842 IC3.17 | length 34.2
  Top Layer w0.9: v1(88.798,69.85) 91.948,73 IC3.17 ; v1(94.564,84.379) 94.564,86.614 96.19,88.24 100.508,88.24 100.508,86.842 10.1@101.908,86.842
  Bottom Layer w0.9: v1(88.798,69.85) 88.798,78.122 94.564,83.888 v1(94.564,84.379)
ic33: 10.1@105.464,86.842 IC3.16 | length 30.6
  Top Layer w0.9: IC3.16 93.218,71.73 94.691,70.256 102.057,70.256 104.38,72.579 104.38,86.842 10.1@105.464,86.842
ic34: 10.1@108.893,86.715 IC3.15 | length 23.9
  Top Layer w0.9: v1(93.218,76.86) 94.149,76.86 IC3.15 ; v1(107.493,84.785) 108.255,86.715 10.1@108.893,86.715
  Bottom Layer w0.9: v1(93.218,76.86) 98.552,76.86 106.477,84.785 v1(107.493,84.785)
ic35: 10.1@90.732,79.222 IC3.14 | length 77.3
  Top Layer w0.9: v1(88.265,80.264) 89.307,79.222 10.1@90.732,79.222 ; v1(95.758,72.009) IC3.14
  Bottom Layer w0.9: v1(88.265,80.264) 87.833,80.696 85.395,80.696 84.709,80.01 84.709,59.207 108.585,59.207 109.449,60.071 109.449,66.218 105.512,70.155 97.612,70.155 v1(95.758,72.009)
ic36: 10.1@94.161,79.222 IC3.13 | length 6.9
  Top Layer w0.9: 10.1@94.161,79.222 95.301,79.222 95.301,77.699 97.028,75.971 IC3.13
ic37: 10.1@97.463,79.222 IC3.12 | length 5.8
  Top Layer w0.9: 10.1@97.463,79.222 97.463,78.61 98.298,78.61 IC3.12
ic38: 10.1@100.892,79.095 IC3.11 | length 6.2
  Top Layer w0.9: IC3.11 99.568,75.489 99.619,75.54 99.619,79.095 10.1@100.892,79.095
led: 330.2 LED.1 | length 6.5
  Top Layer w0.9: LED.1 104.038,101.47 104.038,99.847 104.775,99.847 105.537,99.085 105.537,98.272 330.2
NewNet: 
r1: 1k.2@82.55,57.373 ?.1@86.476,60.966 | length 6.1
  Top Layer w0.9: 1k.2@82.55,57.373 82.55,58.623 84.134,58.623 ?.1@86.476,60.966
r2: 1k.2@82.55,61.183 ?.2@86.476,63.506 | length 4.9
  Top Layer w0.9: 1k.2@82.55,61.183 84.873,63.506 ?.2@86.476,63.506
r3: 1k.2@82.55,64.516 ?.3@86.476,66.046 | length 5.5
  Top Layer w0.9: 1k.2@82.55,64.516 82.55,66.046 ?.3@86.476,66.046
r4: 1k.2@82.55,67.951 ?.4@86.476,68.586 | length 4.2
  Top Layer w0.9: 1k.2@82.55,67.951 84.176,67.951 84.811,68.586 ?.4@86.476,68.586
r5: 1k.2@82.55,71.507 ?.5@86.476,71.126 | length 4.1
  Top Layer w0.9: 1k.2@82.55,71.507 84.303,71.507 84.684,71.126 ?.5@86.476,71.126
r6: 1k.2@82.55,74.946 ?.6@86.476,73.666 | length 4.5
  Top Layer w0.9: 1k.2@82.55,74.946 83.831,73.666 ?.6@86.476,73.666
r7: 1k.2@82.55,78.238 ?.7@86.476,76.206 | length 4.8
  Top Layer w0.9: 1k.2@82.55,78.238 84.582,76.206 ?.7@86.476,76.206
r8: 1k.2@82.55,81.492 ?.8@86.476,78.746 | length 5.9
  Top Layer w0.9: 1k.2@82.55,81.492 82.55,81.28 83.484,80.346 86.14,80.346 86.476,80.01 ?.8@86.476,78.746
ra1: ?.1@24.257,129.032 IC1.1 | length 5.4
  Top Layer w0.9: ?.1@24.257,129.032 27.686,125.603 IC1.1
ra2: ?.2@24.257,126.492 IC1.2 | length 5.4
  Top Layer w0.9: ?.2@24.257,126.492 24.257,125.702 24.982,125.702 26.007,124.677 26.007,124.028 26.21,123.825 IC1.2
ra3: ?.3@24.257,123.952 IC1.3 | length 4
  Top Layer w0.9: ?.3@24.257,123.952 25.584,122.625 26.975,122.625 26.975,122.555 IC1.3
ra4: ?.4@24.257,121.412 IC1.4 | length 3.5
  Top Layer w0.9: ?.4@24.257,121.412 25.908,121.412 26.035,121.285 IC1.4
ra5: ?.5@24.257,118.872 IC1.5 | length 3.9
  Top Layer w0.9: ?.5@24.257,118.872 25.4,120.015 IC1.5
ra6: ?.6@24.257,116.332 IC1.6 | length 4.4
  Top Layer w0.9: ?.6@24.257,116.332 26.67,118.745 IC1.6
ra7: ?.7@24.257,113.792 IC1.7 | length 28.2
  Top Layer w0.9: ?.7@24.257,113.792 22.504,112.039 22.504,110.49 23.495,109.499 25.425,109.499 29.108,113.182 33.655,113.182 34.392,113.919 34.392,117.043 33.96,117.475 IC1.7
ra8: ?.8@24.257,111.252 IC1.8 | length 7
  Top Layer w0.9: ?.8@24.257,111.252 26.01,113.005 26.01,114.503 25.933,114.579 25.933,115.468 26.67,116.205 IC1.8
RC: 330.1 "10 mf.1" LM7805.3 | length 19.7
  Top Layer w0.9: 97.846,101.47 99.873,101.47 99.873,102.972 104.8,102.972 105.537,102.235 105.537,101.372 330.1 105.741,104.521 103.753,106.509 LM7805.3
VCC: 4.7k.1 10.1@27.178,81.267 10.2@34.544,81.267 10.2@40.64,81.267 10.2@46.03,81.267 10.2@53.086,81.267 10.2@58.928,81.267 10.2@64.897,81.267 10.2@71.12,81.267 ?.1@99.314,126.111 LM7805.1 | length 404.4
  Top Layer w0.9: 4.7k.1@23.241,65.506 23.241,79.108 24.587,80.188 ; v1(25.324,67.64) 24.587,68.377 24.587,80.188 ; v1(28.245,134.188) 23.393,134.188 21.285,132.08 21.285,83.82 23.838,81.267 25.667,81.267 ; 4.7k.1@30.449,65.506 30.785,65.506 32.207,66.928 32.207,80.455 33.02,81.267 34.544,81.267 36.284,81.267 ; 4.7k.1@37.362,65.506 38.811,65.506 v1(38.811,67.64) ; 4.7k.1@44.379,65.506 44.78,65.506 v1(44.78,70.891) ; 10.2@46.03,81.267 47.777,81.267 47.777,85.321 46.99,86.109 44.221,86.109 42.139,84.026 42.139,81.267 40.64,81.267 36.284,81.267 ; v1(49.962,75.133) 49.962,73.533 50.622,72.873 ; 4.7k.1@50.896,65.506 50.622,65.506 50.622,72.873 ; v1(56.134,67.437) 56.134,67.945 56.388,67.691 v1(60.452,67.691) 58.483,67.691 v1(58.293,67.501) 57.443,67.501 56.134,66.191 56.82,65.506 4.7k.1@57.404,65.506 ; 4.7k.1@64.135,65.506 64.338,65.506 64.338,66.396 v1(65.481,67.539) ; 10.2@71.12,81.267 68.961,81.267 ; 4.7k.1@71.147,65.506 69.85,65.506 69.85,70.993 68.783,72.06 68.783,81.09 68.961,81.267 ; v1(97.79,131.445) 97.673,131.328 97.673,111.883 99.193,110.363 LM7805.1 ; 24.587,80.188 25.667,81.267 ; 25.667,81.267 27.178,81.267 29.032,81.267 32.956,85.192 35.56,85.192 36.284,84.467 36.284,81.267 ; 50.622,72.873 50.622,79.375 51.753,80.505 51.753,81.267 53.086,81.267 58.928,81.267 64.897,81.267 68.961,81.267
  Bottom Layer w0.9: v1(25.324,67.64) 30.429,67.64 37.059,74.27 38.938,74.27 ; v1(28.245,134.188) 91.237,134.188 99.314,126.111 99.314,129.921 v1(97.79,131.445) ; v1(38.811,67.64) 37.059,69.393 37.059,72.39 38.938,74.27 ; v1(44.78,70.891) 54.204,70.891 ; v1(49.962,75.133) 50.825,74.27 ; 55.626,69.367 55.626,70.129 54.864,70.891 ; v1(56.134,67.437) 56.134,68.859 ; 56.185,68.91 v1@57.594,67.501 ; v1(58.293,67.501) v1@57.594,67.501 ; v1(60.452,67.691) 61.964,67.691 62.091,67.818 62.351,67.558 ; 62.549,67.564 65.456,67.564 v1(65.481,67.539) ; 38.938,74.27 49.962,74.27 50.825,74.27 ; 50.825,74.27 51.486,74.27 54.864,70.891 ; 50.825,74.27 54.204,70.891 ; 54.204,70.891 55.677,69.418 v1@57.594,67.5 ; 54.204,70.891 54.864,70.891
pads on no net: ?.15 IC1.10 IC2.10 IC3.10
copper on no net: | length 155.6
  Bottom Layer w0.254: 20.956,138.045 20.957,138.553 ; 22.479,137.786 20.956,138.299 ; 22.482,138.802 20.956,138.299 ; 57.954,138.194 20.956,138.299 ; 74.002,138.149 110.999,138.045 ; 109.474,137.541 110.999,138.045 ; 109.477,138.557 110.999,138.045 ; 110.999,137.791 111,138.299 ; 114.432,134.745 114.935,136.271 ; 114.676,54.989 115.189,53.467 ; 114.681,136.27 115.189,136.272 ; 114.935,53.466 115.443,53.468 ; 115.037,102.893 114.935,136.271 ; 115.087,86.845 115.189,53.467 ; 115.448,134.749 114.935,136.271 ; 115.692,54.993 115.189,53.467

## Keep-outs
Keep-Out Layer:
  lines w0.254: 20.447,23.368 20.574,23.241 ; 20.828,23.241 21.392,23.241 ; 99.822,71.628 100.076,71.882 ; 110.871,53.467 20.32,53.467 20.32,135.89 20.32,136.144 110.871,136.144 111.125,135.89 111.125,53.467

## Other copper
Bottom Layer:
  text "90.043 (mm)" at 58.205,137.279 h1.52 r359.84
  text "82.804 (mm)" at 114.124,102.636 h1.52 r270.18

## Text inside footprints (layer, text, board x,y; h text height)
?: Top Overlay "Block Connector" at 95.518,129.966 h1.02